# EAGLE board WaveGlide2.0-Main (EAGLE 8.7.0)

Size 80 x 100 mm. Coordinates in mm from the lower left corner, seen from the top.
Outline: 0,0 80,0 80,100 0,100 0,0
Copper layers (1*16): Top 0.035mm / dielectric 1.5mm / Bottom 0.035mm
Design rules "default": minimum track width 6mil, minimum drill 0.35mm, track to track 6mil, track to pad 6mil, pad to pad 6mil, via to via 6mil, smd to smd 6mil, copper to edge 40mil, drill to drill 6mil, minimum pad ring 10mil, minimum via ring 8mil, stop-mask expansion 4mil, vias tented up to drill 0mil, thermal gap 10mil
Net classes: 1 power: width 0.305 mm

## Footprints (pad centres in the part's own frame; a part is rotated, then mirrored left to right if it is on the bottom)
C0805 = smd 1.3 x 1.5: 1 -0.95,0; 2 0.95,0
C1210 = smd 1.6 x 2.7: 1 -1.4,0; 2 1.4,0
4UCONN_20329 = smd 1 x 2: BASE@1 -0.75,-2; BASE@2 0.75,-2 | smd 0.4 x 1.35: D+ 0,0.775; D- -0.65,0.775; GND 1.3,0.775; ID 0.65,0.775; VBUS -1.3,0.775 | drill 0.7 offset: SPRT@1 -3.3,0.9; SPRT@2 3.3,0.9 | drill 0.6 pad 2.5 square: SPRT@3 -3.6,-1.9; SPRT@4 3.6,-1.9 | hole 0.7: -1.95,0; 1.95,0
SOD-123_MINI-SMA = smd 1.5 x 2.1: A 1.8,0; C -1.8,0
SOD323-W = smd 1.5 x 1.2: A 1.45,0; C -1.45,0
SO08 = smd 0.6 x 2.2: 1 -1.905,-2.6; 2 -0.635,-2.6; 3 0.635,-2.6; 4 1.905,-2.6; 5 1.905,2.6; 6 0.635,2.6; 7 -0.635,2.6; 8 -1.905,2.6
2X03 = drill 1.016 octagon: 1 -2.54,-1.27; 2 -2.54,1.27; 3 0,-1.27; 4 0,1.27; 5 2.54,-1.27; 6 2.54,1.27
MS-20-310-HN = drill 0.9 pad 1.85 long: 1 4.7,0; 2 -4.7,0 | drill 0.9 pad 2.2 long: 3 0,-4.75 | hole 3.3: 0,0; -7,-22.9; 7,-27.9
L4532P = smd 1.8 x 3.6: 1 -2,0; 2 2,0
BTN_KMR2_4.6X2.8 = smd 0.9 x 1: A 2.05,0.8; A' -2.05,0.8; B 2.05,-0.8; B' -2.05,-0.8
R0603 = smd 1 x 1.1: 1 -0.85,0; 2 0.85,0
TQFP32-08 = smd 1.27 x 0.559: 1 -4.293,2.8; 2 -4.293,2; 3 -4.293,1.2; 4 -4.293,0.4; 5 -4.293,-0.4; 6 -4.293,-1.2; 7 -4.293,-2; 8 -4.293,-2.8; 17 4.293,-2.8; 18 4.293,-2; 19 4.293,-1.2; 20 4.293,-0.4; 21 4.293,0.4; 22 4.293,1.2; 23 4.293,2; 24 4.293,2.8 | smd 0.559 x 1.27: 9 -2.8,-4.293; 10 -2,-4.293; 11 -1.2,-4.293; 12 -0.4,-4.293; 13 0.4,-4.293; 14 1.2,-4.293; 15 2,-4.293; 16 2.8,-4.293; 25 2.8,4.293; 26 2,4.293; 27 1.2,4.293; 28 0.4,4.293; 29 -0.4,4.293; 30 -1.2,4.293; 31 -2,4.293; 32 -2.8,4.293
BMP180 = smd 0.6 x 0.5: 1 1.5,1.45; 2 0,1.45; 3 -1.5,1.45; 4 -1.5,-1.45; 5 0,-1.45; 6 1.5,-1.45 | smd 0.5 x 0.6: 7 1.5,0
MPXV7002 = smd 2.54 x 1.524: 1 8.382,-3.81; 2 8.382,-1.27; 3 8.382,1.27; 4 8.382,3.81; 5 -8.382,3.81; 6 -8.382,1.27; 7 -8.382,-1.27; 8 -8.382,-3.81
PWP14 = smd 1.676 x 0.356: 1 -2.819,1.95; 2 -2.819,1.3; 3 -2.819,0.65; 4 -2.819,0; 5 -2.819,-0.65; 6 -2.819,-1.3; 7 -2.819,-1.95; 8 2.819,-1.95; 9 2.819,-1.3; 10 2.819,-0.65; 11 2.819,0; 12 2.819,0.65; 13 2.819,1.3; 14 2.819,1.95 | smd 2.46 x 2.31: 15 0,0
FPC_XF2M-3015-1A = smd 0.25 x 1.1: P$1 7.25,-2.63; P$2 6.75,-2.63; P$3 6.25,-2.63; P$4 5.75,-2.63; P$5 5.25,-2.63; P$6 4.75,-2.63; P$7 4.25,-2.63; P$8 3.75,-2.63; P$9 3.25,-2.63; P$10 2.75,-2.63; P$11 2.25,-2.63; P$12 1.75,-2.63; P$13 1.25,-2.63; P$14 0.75,-2.63; P$15 0.25,-2.63; P$16 -0.25,-2.63; P$17 -0.75,-2.63; P$18 -1.25,-2.63; P$19 -1.75,-2.63; P$20 -2.25,-2.63; P$21 -2.75,-2.63; P$22 -3.25,-2.63; P$23 -3.75,-2.63; P$24 -4.25,-2.63; P$25 -4.75,-2.63; P$26 -5.25,-2.63; P$27 -5.75,-2.63; P$28 -6.25,-2.63; P$29 -6.75,-2.63; P$30 -7.25,-2.63 | smd 1.7 x 1.5: SUPPORT1 8.9,1.27; SUPPORT2 -8.9,1.27
SHORT = smd 1.27 x 0.635: P$1 -0.127,0; P$2 0.127,0
RESONATOR-SMD = smd 0.7 x 1.7: 1 -1.2,0; 2 0,0; 3 1.2,0

## Placement (x,y rotation side)
C1  0.1uF  [C0805]  23.44,77.72 90 top
C2  1.0uF  [C0805]  37.34,90.68 270 bottom
C3  10uF  [C0805]  34.8,90.68 90 bottom
C4  1.0uF  [C0805]  32.26,90.68 90 bottom
C5  10uF  [C0805]  44.96,90.68 270 bottom
C6  0.01uF  [C0805]  48.26,80.01 0 top
C7  1.0uF  [C0805]  48.26,82.55 0 top
C8  470pF  [C0805]  48.26,77.47 0 top
C9  10uF  [C0805]  -7.62,-5.08 0 top  (outside the outline)
C10  100nF  [C0805]  -7.62,-11.43 0 top  (outside the outline)
C11  10uF  [C0805]  47.5,90.68 270 bottom
C12  22nF  [C0805]  -7.62,-17.78 0 top  (outside the outline)
C13  10nF  [C0805]  -7.62,-24.13 0 top  (outside the outline)
C14  22uF  [C1210]  -1.4,-76.2 0 top  (outside the outline)
C15  1.0uF  [C0805]  -7.62,-36.83 0 top  (outside the outline)
C16  100nF  [C0805]  -7.62,-43.18 0 top  (outside the outline)
CN3  0  [4UCONN_20329]  4.18,77.99 270 top
D1  CGRM4004-G  [SOD-123_MINI-SMA]  32.33,42.95 180 top
D2  1N4148  [SOD323-W]  40.13,87.12 180 bottom
D3  1N4148  [SOD323-W]  35.05,87.12 180 bottom
IC1  MC33502D  [SO08]  31.75,82.55 90 top
JP1  0  [2X03]  18.43,71.34 180 top
K2  MS-20-310-HN  [MS-20-310-HN]  40,31 0 top
L1  3.3uH  [L4532P]  -15.24,-58.42 0 top  (outside the outline)
Q2  reset  [BTN_KMR2_4.6X2.8]  10.81,72.14 180 top
R1  560k  [R0603]  39.88,91.18 90 bottom
R2  10k  [R0603]  20.95,96.52 90 top
R3  10k  [R0603]  18.03,96.52 90 top
R4  10k  [R0603]  15.24,96.52 90 top
R5  60.4k  [R0603]  -7.62,-48.26 0 top  (outside the outline)
R6  50  [R0603]  42.42,91.18 90 bottom
R7  68  [R0603]  8.89,77.47 0 top
R8  1.5k  [R0603]  8.13,82.8 270 top
R9  1.7k  [R0603]  31.75,77.47 270 top
R10  3.3k  [R0603]  29.21,77.47 270 top
R11  68  [R0603]  8.87,79.76 180 top
R12  953  [R0603]  -7.62,-53.34 0 top  (outside the outline)
R13  86.6k  [R0603]  -7.62,-58.42 0 top  (outside the outline)
R14  10k  [R0603]  20.32,78.69 270 top
R15  10k  [R0603]  -7.62,-63.5 0 top  (outside the outline)
U1  ATMEGA328P_TQFP  [TQFP32-08]  19.05,87.63 0 top
U2  BMP180  [BMP180]  9.47,92.56 270 top
U3  MPXV7002  [MPXV7002]  40.73,92.43 0 top
U4  TPS55340PWP  [PWP14]  -2.82,-101.69 0 top  (outside the outline)
U5  UG-2828GDEDF11  [FPC_XF2M-3015-1A]  40,96.72 0 bottom
U$2  SHORT  [SHORT]  28.07,73.66 180 top
Y2  12MHz  [RESONATOR-SMD]  12.78,84.39 270 top

## Library data of the parts
C1-C4 C6-C8 R1-R4 R6-R8 R11 R14 = resistor; POPULATE: 1
C5 C11 = resistor; POPULATE: 1; VOLT: 16V
C9 = resistor; MPN: GRM219R61A106KE44D; POPULATE: 1
C10 = resistor; MPN: CC0805KRX7R8BB104; POPULATE: 1
C12 = resistor; MPN: GRM033R60J223KE01D; POPULATE: 1
C13 = resistor; MPN: GCM2195C1H103JA16D; POPULATE: 1
C14 = resistor; MPN: GRM32ER61C226ME20L; POPULATE: 1
C15 = resistor; MPN: EMK107B7105KA-T; POPULATE: 1
C16 = resistor; MPN: 08053C104JAZ2A; POPULATE: 1
CN3 Q2 U5 = microbuilder; POPULATE: 1
D1 D3 = diode; POPULATE: 1
D2 = diode; MPN: MBRD835LT4G; POPULATE: 1
IC1 = linear; POPULATE: 1
JP1 = pinhead; POPULATE: 1
K2 U3 = CustomParts; POPULATE: 1
L1 = resistor; MPN: XAL5030-332MEB; POPULATE: 1
R5 = resistor; MPN: CRCW040260K4FKED; POPULATE: 1
R9 R10 = resistor; POPULATE: 1; TOL: 1%
R12 = resistor; MPN: CRCW0402953RFKED; POPULATE: 1
R13 = resistor; MPN: CRCW040286K6FKED; POPULATE: 1
R15 = resistor; MPN: RR1220P-103-D; POPULATE: 1
U1 = CustomParts; MPN: TPS55340RTER; POPULATE: 1; PROD_ID: IC-09069
U2 = CustomParts; POPULATE: 1; PROD_ID: IC-11600; SF_ID: 11823
U4 = CustomParts; MANUFACTURER_PART_NUMBER: TPS55340PWP; VENDOR: Texas Instruments
U$2 = CustomParts; BOM: EXCLUDE; POPULATE: 1
Y2 = SparkFun; POPULATE: 1

## Nets
AGND: C6.2 C7.2 C8.2 IC1.4 R10.2 U3.3 U$2.P$2
BUF1_LOOP: IC1.1 IC1.2 R9.1
D+1: CN3.D+ R7.2
D-1: CN3.D- R8.2 R11.2
GND: C1.2 C2.2 C3.2 C4.2 C5.2 C9.2 C10.2 C11.2 C12.2 C13.2 C14.2 C15.2 C16.2 CN3.BASE@1 CN3.BASE@2 CN3.GND CN3.SPRT@1 CN3.SPRT@2 CN3.SPRT@3 CN3.SPRT@4 D1.A D3.C JP1.6 K2.2 K2.3 Q2.B Q2.B' R1.1 R5.1 R15.2 U1.3 U1.5 U1.21 U2.7 U4.7 U4.12 U4.13 U4.14 U4.15 U5.P$1 U5.P$3 U5.P$13 U5.P$14 U5.P$15 U5.P$16 U5.P$20 U5.P$21 U5.P$22 U5.P$23 U5.P$24 U5.P$30 U$2.P$1 Y2.2
MCU_AREF: C1.1 U1.20
MCU_I2C_SCL: R3.1 U1.28 U2.5
MCU_I2C_SDA: R4.1 U1.27 U2.6
MCU_OLED_CS: R14.1 U1.14 U5.P$12
MCU_OLED_DC: U1.12 U5.P$11
MCU_OLED_RES: U1.13 U5.P$10
MCU_PROG/OLED_MOSI: JP1.4 U1.15 U5.P$18
MCU_PROG/OLED_SCK: JP1.3 U1.17 U5.P$17
MCU_PROG_MISO: JP1.1 U1.16
MCU_RESET: JP1.5 Q2.A Q2.A' R2.1 U1.29
MPXV_VS_5V: C8.1 IC1.3 U3.4
MPXV_VS_MCU: IC1.6 IC1.7 U1.26
N$1: D2.C D3.A
N$2: D2.A R6.1
N$4: IC1.5 R9.2 R10.1
N$9: U1.7 Y2.1
N$10: U1.8 Y2.3
OLED_IREF: R1.2 U5.P$9
OLED_VCOMH: C5.1 U5.P$28
OLED_VDD: C2.1 U5.P$5
OLED_VSL: R6.2 U5.P$26
SOLENOID_12V: C14.1 C15.1 D1.C K2.1 R13.1
SOLENOID_EN: U4.4
SYS_3V3: C3.1 C4.1 R2.2 R3.2 R4.2 R8.1 R14.2 U1.4 U1.6 U1.18 U2.2 U2.3 U5.P$4 U5.P$27
SYS_5V: C6.1 C7.1 IC1.8 U3.2
SYS_13V: C11.1 U5.P$29
TPS55340_COMP: C13.1 R12.2 U4.8
TPS55340_FB: R13.2 R15.1 U4.9
TPS55340_FREQ: R5.2 U4.10
TPS55340_SS: C12.1 U4.5
TPS55340_SW: L1.1 U4.1 U4.2
TPS66340_COMP1: C16.1 R12.1
USB_D+: R7.1 U1.32
USB_D-: R11.1 U1.11
VBAT: C9.1 C10.1 L1.2 U4.3
VBUS: CN3.VBUS

## Tracks (layer width: path | path; a pad name or v marks a point on that pad's centre or on a via)
AGND  (6 unrouted)
BUF1_LOOP  (2 unrouted)
D+1  (1 unrouted)
D-1  (2 unrouted)
GND  (52 unrouted)
MCU_AREF  (1 unrouted)
MCU_I2C_SCL  (2 unrouted)
MCU_I2C_SDA  (2 unrouted)
MCU_OLED_CS  (2 unrouted)
MCU_OLED_DC  (1 unrouted)
MCU_OLED_RES  (1 unrouted)
MCU_PROG/OLED_MOSI  (2 unrouted)
MCU_PROG/OLED_SCK  (2 unrouted)
MCU_PROG_MISO  (1 unrouted)
MCU_RESET  (4 unrouted)
MPXV_VS_5V  (2 unrouted)
MPXV_VS_MCU  (2 unrouted)
N$1  (1 unrouted)
N$2  (1 unrouted)
N$4  (2 unrouted)
N$9  (1 unrouted)
N$10  (1 unrouted)
OLED_IREF  (1 unrouted)
OLED_VCOMH  (1 unrouted)
OLED_VDD  (1 unrouted)
OLED_VSL  (1 unrouted)
SOLENOID_12V  (4 unrouted)
SYS_3V3  (13 unrouted)
SYS_5V  (3 unrouted)
SYS_13V  (1 unrouted)
TPS55340_COMP  (2 unrouted)
TPS55340_FB  (2 unrouted)
TPS55340_FREQ  (1 unrouted)
TPS55340_SS  (1 unrouted)
TPS55340_SW  (2 unrouted)
TPS66340_COMP1  (1 unrouted)
USB_D+  (1 unrouted)
USB_D-  (1 unrouted)
VBAT  (3 unrouted)